# Altium PCB PCB_power_distrubation.PcbDoc
Units mm, origin at the board's own origin, x right, y up, seen from the top; angles counter-clockwise.
Board outline 53.25 x 77.5 mm, 2 copper layers (Top Layer, Bottom Layer); 14 components, 8 nets, 35 pads, 15 vias.
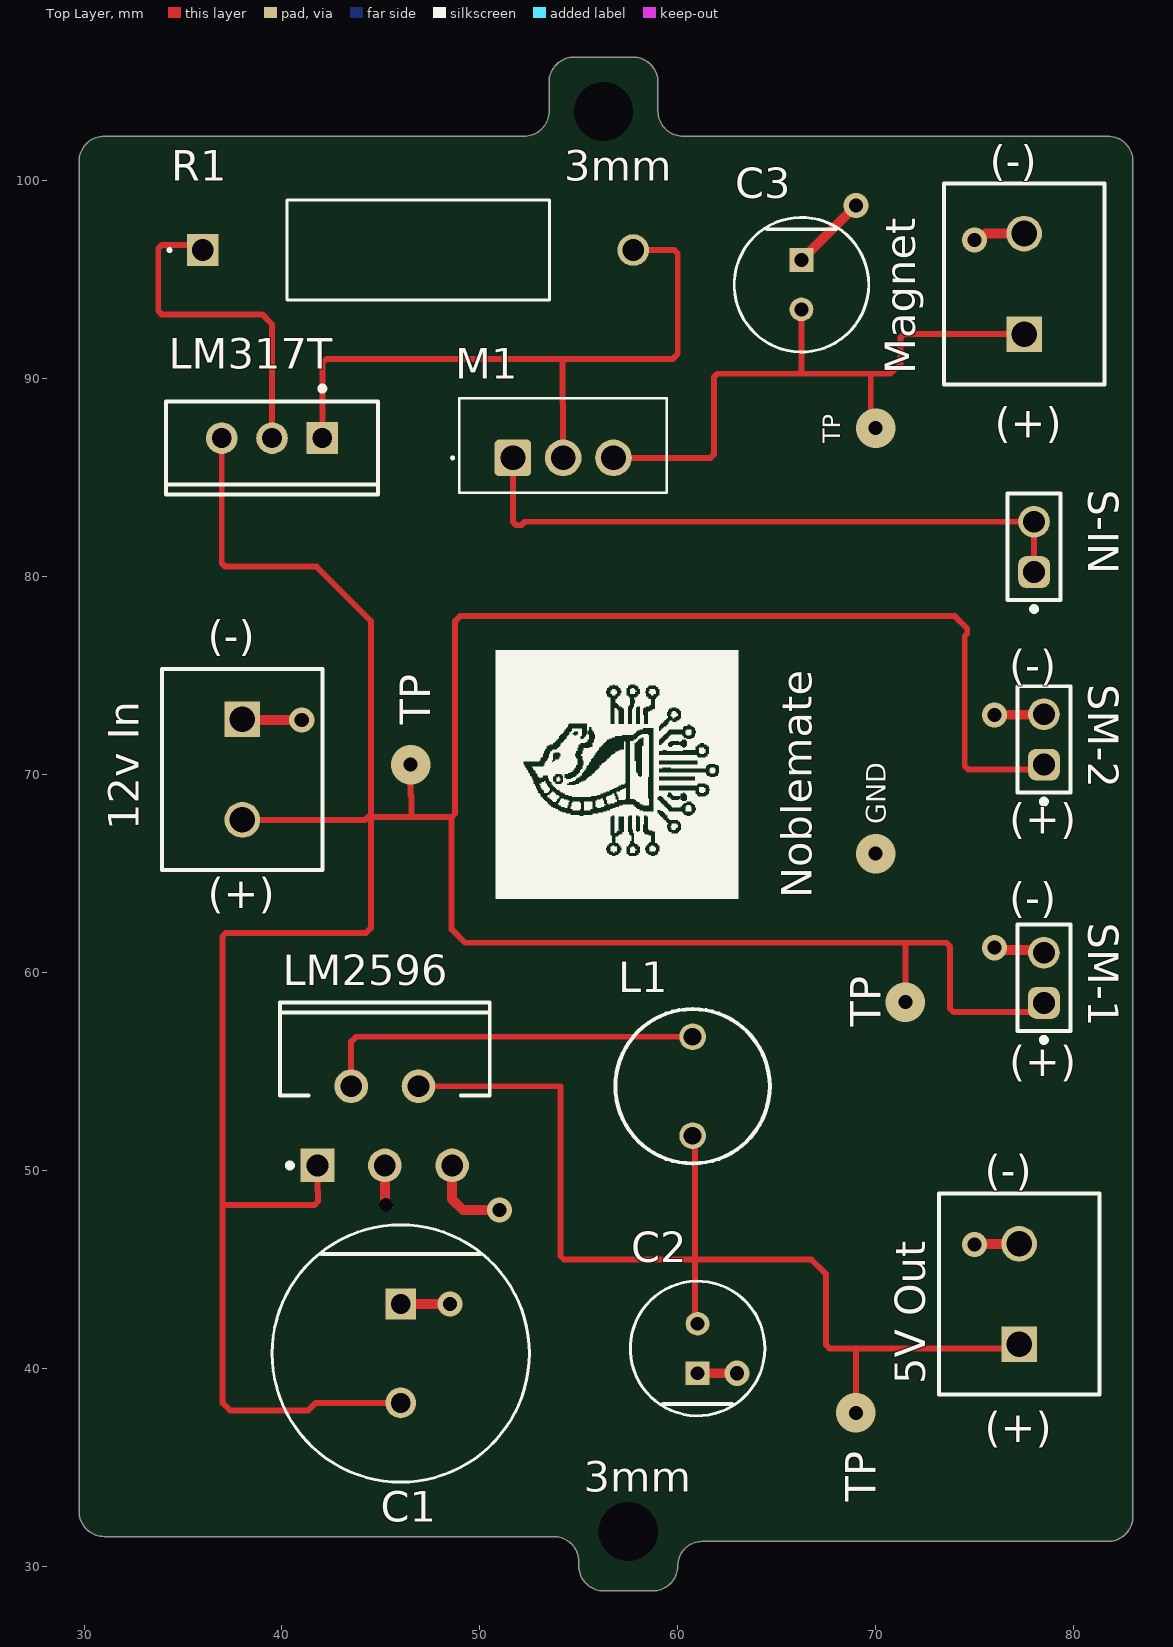
[diagram p0: Top Layer view]
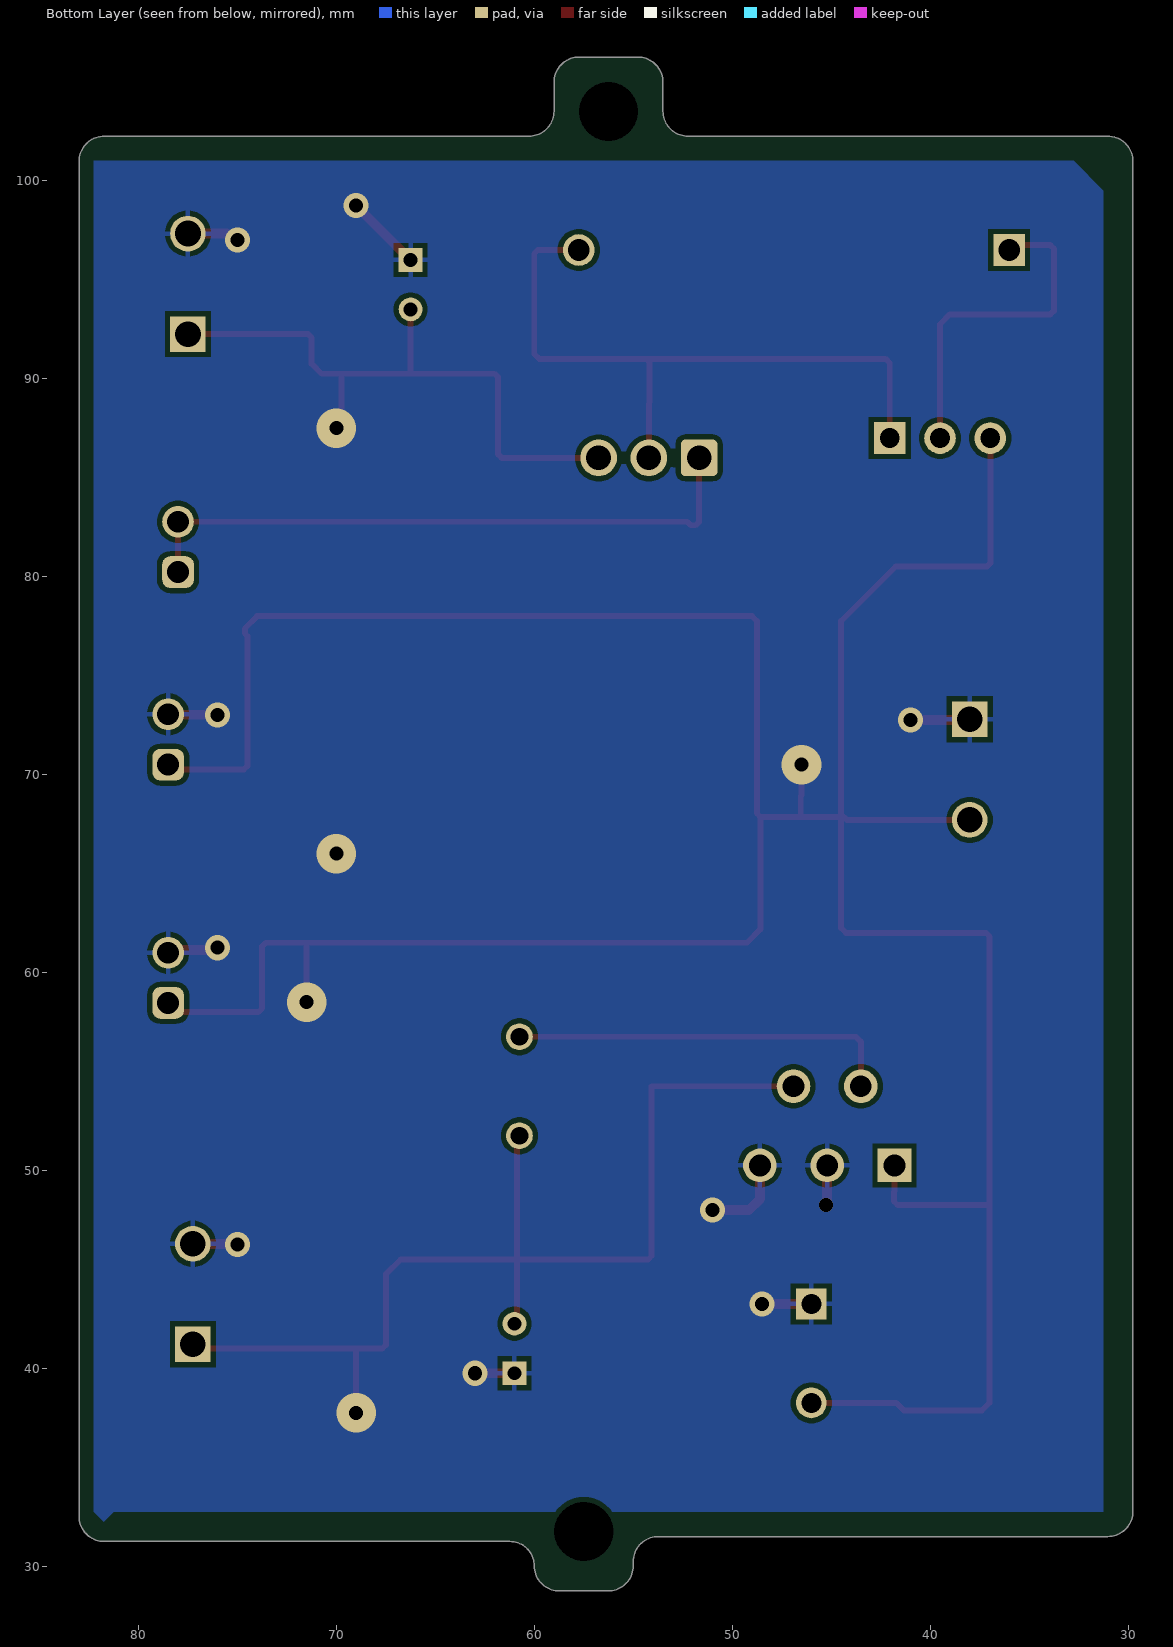
[diagram p1: Bottom Layer view, seen from below]
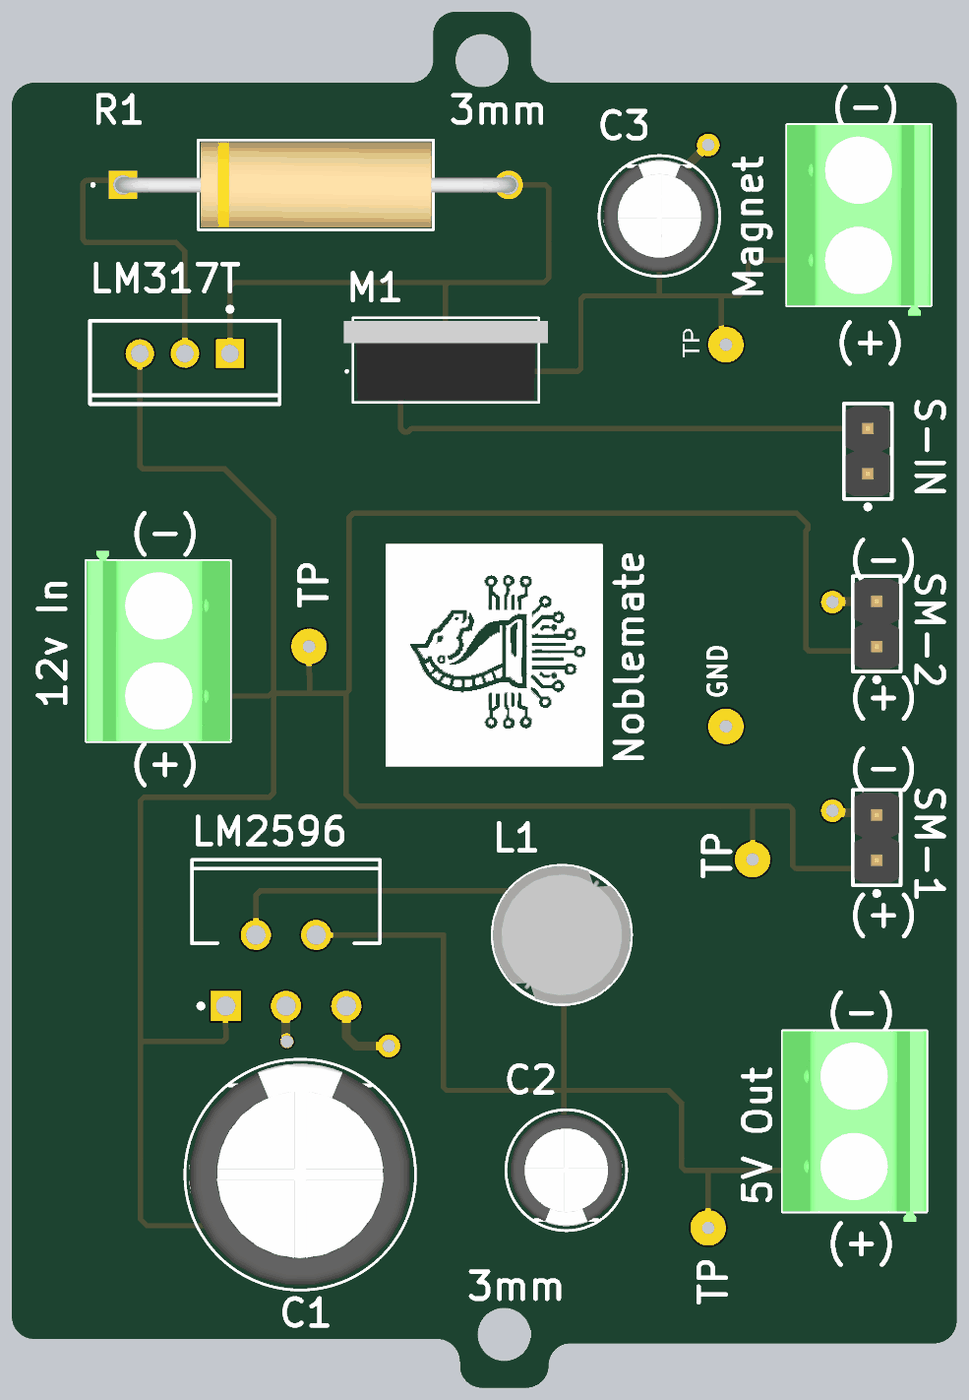
[diagram p2: 3D render of the assembled board from above, using the file's embedded part models]

## Layer stack, top to bottom
Top Solder: solder mask 0.0102, Solder Resist, Dk 3.5
Top Layer: signal copper 0.0356
Dielectric 1: dielectric 0.32, FR-4, Dk 4.8
Bottom Layer: signal copper 0.0356
Bottom Solder: solder mask 0.0102, Solder Resist, Dk 3.5

## Board outline
31.02,31.5 cw(c31.02,32.77) 29.75,32.77 29.75,100.98 cw(c31.02,100.98) 31.02,102.25 52.23,102.25 ccw(c52.23,103.52) 53.5,103.52 53.5,104.98 cw(c54.77,104.98) 54.77,106.25 57.73,106.25 cw(c57.73,104.98) 59,104.98 59,103.52 ccw(c60.27,103.52) 60.27,102.25 81.73,102.25 cw(c81.73,100.98) 83,100.98 83,32.52 cw(c81.73,32.52) 81.73,31.25 61.23,31.25 ccw(c61.23,30.02) 60,30.02 cw(c58.73,30.02) 58.73,28.75 56.27,28.75 cw(c56.27,30.02) 55,30.02 55,30.23 ccw(c53.73,30.23) 53.73,31.5

## Design rules (kind name [scope] priority, off if disabled: settings)
Clearance [All] p1: gap=0.254 ignorepadtopadclearanceinfootprint=FALSE
PolygonConnect [All] p1: connectstyle=Relief reliefconductorwidth=0.254 reliefentries=4 polygonreliefangle="90 Angle" airgapwidth=0.254
RoutingVias [All] p1: holewidth=0.711 width=1.27 viastyle="Through Hole" minholewidth=0.711 minwidth=1.27 maxholewidth=0.711 maxwidth=1.27
SolderMaskExpansion [All] p1: expansion=0.102 istentingtop=FALSE
SupplyNets "Schematic Supply Nets" [InNet('GND')] p1: voltage=0.000
Width [All] p1: maxlimit=0.5 minlimit=0.254 preferedwidth=0.3
30 further rules are at their usual default settings.

## Components (designator, comment, footprint, x,y, rotation, side; value= is the part's Value field where it differs from the comment)
"5V Out" "1729128" PHOE-1729128-2_V 77.25,43.75 r90 top (schematic designator HD1)
"12v In" "1729128" PHOE-1729128-2_V 38,70.25 r270 top (schematic designator HD6)
C1 "EEUFR1H681L" FP-RAD-TH-D_12_5_0_5-L_30-MFG 46,40.75 r270 top
C2 "EEUFR1E101B" FP-RAD-TH-D_6_3_0_5-L_11-MFG 61,41 r90 top
C3 "EEUFR1E101B" FP-RAD-TH-D_6_3_0_5-L_11-MFG 66.25,94.75 r270 top
L1 "744772390" WE-TI-L 60.75,54.25 r270 top
LM317T "LM317T/NOPB" NDE0003A 39.5,87 r180 top
LM2596 "LM2596T-ADJ/NOPB" NDH0005A 45.2,52.25 r0 top
M1 "2SK2927-E" SIP444W76P254L1016H2199Q3_PRSS0004AC-A_N 54.21,86.63 r0 top
Magnet "1729128" PHOE-1729128-2_V 77.5,94.79 r90 top (schematic designator HD3)
R1 "AC03000003008JAC00" RES_AC03_VIS 36.008,96.5 r0 top
S-IN "61300211121" 61300211121 78,81.5 r90 top (schematic designator HD2)
SM-1 "61300211121" 61300211121 78.5,59.73 r90 top (schematic designator HD5)
SM-2 "61300211121" 61300211121 78.5,71.77 r90 top (schematic designator HD4)

## Footprints (in the part's own frame and the unit in brackets; to place one, negate y for a bottom-side part, rotate by r counter-clockwise, add the part's x,y. Pads: shape width x height; smd on the part's side, far side on the other; paste and mask are expansions set on the pad)
61300211121 [mm] "Pin Header, pitch 2.54 mm, THT, Vertical, single row, 2p"
  rrect50% 1.6x1.6 hole 1.1: 1(-1.27,0)
  round 1.6 hole 1.1: 2(1.27,0)
  silkscreen extent -3.26,-1.35 2.69,1.35, body extent -2.54,-1.27 2.54,1.27, height 8.57
FP-RAD-TH-D_6_3_0_5-L_11-MFG [mm]
  rect 1.2x1.2 hole 0.7 paste-2539.97 mask+0: 1(-1.25,0)
  round 1.2 hole 0.7 paste-2539.97 mask+0: 2(1.25,0)
  silkscreen extent -3.4,-3.4 3.4,3.4, body extent -3.5,-3.5 3.5,3.5, height 0.25
FP-RAD-TH-D_12_5_0_5-L_30-MFG [mm]
  rect 1.55x1.55 hole 1 paste-2539.97 mask+0: 1(-2.5,0)
  round 1.55 hole 1 paste-2539.97 mask+0: 2(2.5,0)
  silkscreen extent -6.5,-6.5 6.5,6.5, body extent -6.6,-6.6 6.6,6.6, height 0.25
NDE0003A [mm] "FM, 3-Leads, Body 10.7x4.7mm, Pitch 2.54mm"
  rect 1.6x1.6 hole 1: 1(-2.54,0)
  round 1.6 hole 1: 2(0,0) 3(2.54,0)
  silkscreen extent -5.35,-2.62 5.35,2.85, body extent -5.4,-1.9 5.4,2.9, height 19.4
NDH0005A [mm] "FM, 5-Leads, Body 10.6x4.7mm, Pitch 1.7mm"
  rect 1.7x1.7 hole 1.1: 1(-3.4,-2)
  round 1.7 hole 1.1: 2(-1.7,2) 3(0,-2) 4(1.7,2) 5(3.4,-2)
  silkscreen extent -5.3,-2.12 5.3,6.23, body extent -5.35,-2.31 5.35,6.28, height 21.1
PHOE-1729128-2_V [mm] "Receptacle, 2-Leads, Body 8.1x10.16mm, Pitch 5.08mm"
  rect 1.8x1.8 hole 1.3: 1(-2.54,0)
  round 1.8 hole 1.3: 2(2.54,0)
  silkscreen extent -5.08,-4.05 5.08,4.05, body extent -5.65,-4.05 5.08,4.05, height 10.01
RES_AC03_VIS [mil]
  rect 63x63 / inner round 60 / far side rect 63x63 hole 43 paste-99999 mask+0: 1(0,0)
  round 63 / inner round 60 / far side round 63 hole 43 paste-99999 mask+0: 2(856,0)
  silkscreen extent -69,-100 689,100, body extent -16,-95 873,95, height 189
SIP444W76P254L1016H2199Q3_PRSS0004AC-A_N [mm] "SIP, Body Width 4.44mm, Lead Width 0.76mm, Pitch 2.54mm, Body Length 10.16mm, Height 21.99mm, IPC Medium Density"
  rrect25% 1.85x1.85 hole 1.25: 1(-2.54,-0.63)
  round 1.85 hole 1.25: 2(0,-0.63) 3(2.54,-0.63)
  silkscreen extent -5.64,-2.38 5.24,2.38, body extent -5.43,-2.57 5.43,2.57, height 0.25
WE-TI-L [mm] "THT Inductor, 2-Leads, Body 7.8 x 7.8 mm"
  round 1.35 hole 0.9: 1(-2.5,0) 2(2.5,0)
  silkscreen extent -3.9,-3.9 3.9,3.9, body extent -3.9,-3.9 3.89,3.9, height 9.5

## Part data
"5V Out" "12v In" Magnet: library part CMP-2000-05815-1, "PCB Terminal Block, 13.5 A, 400 V, 2-Pin THD, RoHS, Bulk", Current Rating=13500mA, Manufacturer="Phoenix Contact", Package Description="2-Pin Through Hole Device, Body 8.1 x 10.16 mm, Pitch 5.08 mm", Package Reference=1729128-2, Package Version=03/2015, Voltage Rating=400V, Datasheet URL=https://datasheet.ciiva.com/16046/1729128-16046181.pdf, Datasheet Version=12/2013, Manufacturer URL=http://www.phoenixcontact.com/, Mounting Technology=ThroughHole, No. of Positions=2, No. of Rows=1, Orientation=Horizontal, Package URL=https://www.phoenixcontact.com/online/portal/pi/pxc/product_detail_page/!ut/p/b1/3VdJjqNKFDxLH8AFycySyWY2ozFsEPOMMQaDOX1XedGL_1Vdm5YXJleknhSKeBkvI6EA8ncAo3AYoDhBQGco6KN7VURTdemj9us_IEKEZo_YHiPAEWEFmDGOHMORkqKYCORBZxgL7ZoaZYcbFFUZ3fqxSY6GOuxydWUuHqz1ynmMFygu583Bob0Ewr6Sd_l-5m-kAueHiB0jpRwZwe58wwtkpxtMYd_LmGcDRU02dRNEyWt6Y2ti5pSyJ_reIkzIulrqApdnbT11V5jnCKbYNCvhEM1MCpPByat_X379-iThf08CI5GfOPqfBeS3BRoBOdD55AKVv0iLwCMq-2BrzXWSGRH7pUGD9uwXQjiph3xL0DKQwdGa0JImiIOmBNOestqgwTHSSs2oOep-78apyXQBvNi8ZLaFjvjWvcaUEBu0MC6Wbe-d6mB0FAebo2lUWinqYaZs5DAYzV0RP9yitUjnGJ0iI9xhZkT42OCQNUJJhkgWINNQLP2JFP6OpMg3JCVg70jqHT0lvKOnhHf0lPuOnnLf0VPuWx6_dxwUIvwk5WMkT0kLL1mh61l2yZVSzG3pYV_bqo-mj6uMKwKwdnnW8Jh5RTOJzMOA5c-eJDaZQw4mTMPH02PvS_ZAqNVjVTo2WyYLkwH_KU1mmmG5kjRhDqPXLwwVHvVOjCM60-fpXvTDfMGW1PVFVS1r4e4yVDk4ZdNbkUHvqPqQSeian4UD39fNKmachqdJ1NJbyk8rXT9mXTvPk3oE5meulKGgiruPJek-4I9hTT6G8ZLOyRSm2RRVbThERQad5OS28hdt4YW4vG0stgYYzsWsK4_7y6DZMjJSCqri1kyiZR5vD7pwIrNR7QwPHTcLTI5qT7eRlpHrdGiupYlqQDJ7zy_CND8fWWBoLRXxk1RVcXiBQwbTD4Xi7KL-FuO94t9xaqweXzH, Packing=Bulk, PartNumber=1729128, Pitch=5.08mm, RoHS=TRUE
C1: library part CMP-05427-000465-1, "Aluminum Electrolytic Capacitors (Radial Lead Type) 680uF ±20% 50V"
C2 C3: library part CMP-05427-000897-1, "Aluminum Electrolytic Capacitors (Radial Lead Type) 100uF ±20% 25V", Capacitance=100uF, Case/Package=Radial, ESR (Equivalent Series Resistance)=130mR, Max Operating Temperature=105°C, Min Operating Temperature=-40°C, Package Quantity=2000, Ripple Current=455mA, Tolerance=20%, Voltage Rating=25V, Diameter=6.3mm, Features="General Purpose", Height=11.2mm, Height - Seated (Max)=0.441inch, Impedance=130mR, Lead Diameter=0.5mm, Lead Free="Lead Free", Lead Pitch=5mm, Length=11.2mm, Life (Hours)=2000Hour, Mount="Through Hole", Packaging="Tape and Reel", Polarity=Polar, Radiation Hardening=No, RoHS Compliant=Yes, Series=FR, Termination=Radial, Voltage Rating (DC)=25V
L1: library part CMP-0225-00043-1, "Radial Leaded Wire Wound Inductor WE-TI, L = 39.0 µH", Inductance="39.0 ÂµH", ComponentLink1Description="Manufacturer Link", ComponentLink1URL=http://www.we-online.com, ComponentLink2Description=Datasheet, ComponentLink2URL=http://www.we-online.de/katalog/media/pdf/744772390.pdf, DatasheetVersion="ver 8, Oct-2009", PackageDescription="THT Inductor, 2-Leads, Body 7.8 x 7.8 mm", PackageReference=WE-TI-L, PackageVersion=2006
LM317T: library part CMP-0062-02455-3, "3-Terminal Adjustable Regulator, 3-pin TO-220, Pb-Free", Manufacturer="Texas Instruments", PackageTopMarking="NSUZXYTTE#*LM317T P+", PowerWise=N, ComponentLink1Description="Datasheet URL", ComponentLink1URL=http://www.ti.com/general/docs/lit/getliterature.tsp?genericPartNumber=LM317-N&fileType=pdf, CompType="LDO IC", PackageDescription="TO-220, Molded, 3 Lead, Straight", PackageReference=NDE0003A, PinCount=3, RoHS=Y
LM2596: library part CMP-0069-01928-3, "SIMPLE SWITCHER® Power Converter 150 KHz 3A Step-Down Voltage Regulator, 5-pin TO-220, Pb-Free", Manufacturer="Texas Instruments", PackageTopMarking="NSUZXYTTE#*LM2596T*-ADJ P+", PowerWise=N, ComponentLink1Description="Datasheet URL", ComponentLink1URL=http://www.ti.com/general/docs/lit/getliterature.tsp?genericPartNumber=LM2596&fileType=pdf, CompType=Switcher, PackageDescription="TO-220, Molded, Stagger Bend, 5 Lead", PackageReference=NDH0005A, PinCount=5, RoHS=Y
M1: library part CMP-00572-23028033-1, "Trans MOSFET N-CH Si 60V 10A 3-Pin(3+Tab) TO-220AB Tube", Case/Package=TO-220AB, Continuous Drain Current (ID)=10A, Drain to Source Voltage (Vdss)=60V, Gate to Source Voltage (Vgs)=20V, Manufacturer Lifecycle Status="NOT RECOMMENDED FOR NEW DESIGNS", Max Operating Temperature=150°C, Min Operating Temperature=-55°C, Power Dissipation=30W, China RoHS=Compliant, ComponentLink1Description="Manufacturer's Website", ComponentLink1URL=http://www.renesas.com, ComponentLink2Description="Datasheet URL", ComponentLink2URL=https://octopart.com/cad-content/api/get-model-datasheet/15189/23028033, ComponentLink3Description="Manufacturer's Package Drawing", ComponentLink3URL=https://www.renesas.com/en/document/psc/package-drawing-220ab-4pin-prss0004ac, Fall Time=70ns, Height=4.64mm, HelpURL=https://octopart.com/cad-content/api/get-model-datasheet/15189/23028033, Lead Free="Lead Free", Lifecycle Status=NRND, Mount="Through Hole", Number of Elements=1, Number of Pins=3, Radiation Hardening=No, Rds On Max=75mΩ, Rise Time=55ns, RoHS=Compliant, Turn-Off Delay Time=60ns, Turn-On Delay Time=10ns
R1: library part CMP-00030-39747180-1, "AC03000003008JAC00 Resistor, 3 Ohm, ± 5%, 3 W, Axial Leaded, Wirewound, General Purpose", Case/Package=Axial, Max Operating Temperature=275°C, Max Power Dissipation=3W, Min Operating Temperature=-40°C, Resistance=3Ω, Temperature Coefficient=-80ppm/°C, Tolerance=5%, Voltage Rating=3V, Composition=Wirewound, Contact Plating=Tin, Diameter=4.8mm, Features="Flame Retardant Coating", Lead Diameter=800µm, Length=13mm, NexarPartId=39747180, Number of Pins=2, Number of Terminations=2, Packaging="Tape & Box (TB)", Power Rating=3W, Radiation Hardening=No, REACH SVHC=Unknown, RoHS=Compliant, Schedule B="8533210080, 8533210080", Termination=Axial, Thickness=4.8006mm, Voltage Rating (DC)=3V, Width=4.8mm
S-IN SM-1 SM-2: library part CMP-1712-00002-6, Color=Black, Contact Resistance=20mΩ, Current Rating=3A, Max Operating Temperature=125°C, Min Operating Temperature=-40°C, Operating Supply Voltage=250V, Connector Type="Male Pin", Contact Gender=Male, Contact Material=Copper, Contact Mating Length=5.9944mm, Contact Plating=Gold, Gender=Male, Height=8.94mm, Housing Material=PBT, Lead Free="Lead Free", Lead Pitch=2.54mm, Mount="Through Hole", NexarPartId=20081794, Number of Contacts=2, Number of Pins=2, Number of Positions=2, Number of Rows=1, Orientation=Vertical, Packaging=Bulk, Pitch=2.54mm, REACH SVHC="No SVHC", RoHS=Compliant, Termination="Through Hole", Voltage Rating=250V

## Free pads (board coordinates)
  round 1.524 hole 3 unplated: 1(57.5,31.75) 2(56.25,103.5)

## Via types
v1: diameter 1.27, hole 0.711, Top Layer to Bottom Layer, 9 vias
v2: diameter 2, hole 0.711, Top Layer to Bottom Layer, 5 vias
v3: diameter 0.711, hole 0.711, Top Layer to Bottom Layer, 1 vias

## Nets (pads, with @x,y where several pads share a name; then routed paths per layer and width w, separated by ;. In a path a pad name is that pad's centre, name@x,y a point inside that pad or via, vN(x,y) a via of type N, cw(c..) or ccw(c..) an arc to the next point about the centre after c; other vN are vias at no path point)
GND: "5V Out.2" "12v In.1" C1.1 C2.1 C3.1 LM2596.3 LM2596.5 Magnet.2 SM-1.2 SM-2.2 | length 27.8
  Top Layer w0.5: 38,72.79 38.04,72.75 v1(41,72.75) ; LM2596.3 45.2,48.3 v3(45.25,48.25) ; C1.1 v1(48.5,43.25) ; LM2596.5 48.6,48.543 49.143,48 v1(51,48) ; C2.1 v1(63,39.75) ; C3.1 v1(69,98.75) ; v1(75,46.25) 75.02,46.27 77.23,46.27 77.25,46.29 ; v1(75,97) 75.208,97 75.538,97.33 Magnet.2 ; v1(76,61.25) 76.125,61.125 78.375,61.125 SM-1.2 ; v1(76,73) 76.02,73.02 78.48,73.02 SM-2.2
  other v2: 70,66
NetC1_2: "12v In.2" C1.2 LM317T.3 LM2596.1 SM-1.1 SM-2.1 | length 181.5
  Top Layer w0.3: LM317T.3 36.96,80.676 37.136,80.5 41.75,80.5 44.5,77.75 44.5,68 ; 38,67.71 44.21,67.71 44.5,68 ; LM2596.1 41.8,48.95 41.826,48.924 41.826,48.426 41.65,48.25 37,48.25 ; C1.2 41.707,38.25 41.331,37.874 37.376,37.874 37,38.25 37,48.25 ; v2(46.5,70.5) 46.5,68.972 46.537,68.935 46.537,67.855 ; v2(71.5,58.5) 71.5,61.5 ; SM-1.1 78.04,58 73.926,58 73.75,58.176 73.75,61.324 73.574,61.5 71.5,61.5 ; SM-2.1 78.25,70.25 74.676,70.25 74.5,70.426 74.5,77 74.626,77.126 74.626,77.374 74,78 49,78 48.75,77.75 48.75,68.031 48.574,67.855 ; 37,48.25 37,61.824 37.176,62 44.25,62 44.5,62.25 44.5,67.855 ; 44.5,67.855 46.537,67.855 ; 44.5,67.855 44.5,68 ; 46.537,67.855 48.574,67.855 ; 48.574,67.855 48.574,62.176 49.25,61.5 71.5,61.5
  Top Layer w0.5: SM-2.1@78.25,70.25 78.5,70.25 SM-2.1
NetC2_2: "5V Out.1" C2.2 L1.2 LM2596.4 | length 55.9
  Top Layer w0.3: LM2596.4 54.074,54.25 54.074,45.676 54.25,45.5 60.875,45.5 ; L1.2 60.875,51.625 60.875,45.5 ; C2.2 60.875,42.375 60.875,45.5 ; v2(69,37.75) 69,41 ; 77.25,41.21 77.04,41 69,41 ; 60.875,45.5 66.75,45.5 67.5,44.75 67.5,41.176 67.676,41 69,41
NetC3_2: C3.2 M1.3 Magnet.1 | length 32.5
  Top Layer w0.3: M1.3 61.65,86 61.826,86.176 61.826,90.074 62.001,90.25 66.25,90.25 ; C3.2 66.25,90.25 ; v2(70,87.5) 69.75,87.75 69.75,90.25 ; Magnet.1 71.426,92.25 71.25,92.074 71.25,90.75 70.75,90.25 69.75,90.25 ; 66.25,90.25 69.75,90.25
NetHD2_1: M1.1 S-IN.1 S-IN.2 | length 32.2
  Top Layer w0.3: M1.1 51.67,82.77 51.846,82.594 52.094,82.594 52.27,82.77 S-IN.2 S-IN.1
NetL1_1: L1.1 LM2596.2 | length 19.6
  Top Layer w0.3: LM2596.2 43.5,56.5 43.75,56.75 L1.1
NetLM317T_1: LM317T.1 M1.2 R1.2 | length 34.4
  Top Layer w0.3: LM317T.1 42.04,90.79 42.25,91 54.35,91 ; M1.2 54.21,88.752 54.174,88.788 54.174,90.824 54.35,91 ; R1.2 59.824,96.5 60,96.324 60,91.25 59.75,91 54.35,91
NetLM317T_2: LM317T.2 R1.1 | length 17.4
  Top Layer w0.3: R1.1 35.758,96.75 33.926,96.75 33.75,96.574 33.75,93.426 33.926,93.25 39,93.25 39.5,92.75 LM317T.2

## Polygon pours and split planes (outlines as drawn)
GND on Bottom Layer "GND_L02_P000" (solid, pour order 0): 81.25,32.75 81.75,32.25 82.25,32.75 82.25,101 32.75,101 31.25,99.5 31.25,32.75

## Silkscreen, mask and mechanical layers (free items; w line width, h text height)
Top Overlay:
  drawing of 24 lines, arcs and shapes, not listed
  text "(-)" at 75.754,100.254 h1.52
  text "3mm" at 54.254,100.004 h1.52
  text "(+)" at 76.004,87.004 h1.52
  text "TP" at 68.5,86.75 h1.52 r90
  text "(-)" at 36.254,76.254 h1.52
  text "(-)" at 76.754,74.754 h1.52
  text "TP" at 47.496,72.504 h1.52 r90
  text "GND" at 70.5,67.5 h1 r90
  text "(+)" at 76.754,67.004 h1.52
  text "Noblemate" at 66.774,63.75 h1.52 r90
  text "(+)" at 36.254,63.254 h1.52
  text "(-)" at 76.754,63.004 h1.52
  text "TP" at 70.246,57.254 h1.52 r90
  text "(+)" at 76.754,54.754 h1.52
  text "(-)" at 75.504,49.254 h1.52
  text "(+)" at 75.504,36.254 h1.52
  text "3mm" at 55.254,33.754 h1.52
  text "TP" at 69.996,33.254 h1.52 r90
Mechanical 1:
  lines w0.254: 29.75,32.77 ccw(c31.02,32.77) 31.02,31.5 53.73,31.5 cw(c53.73,30.23) 55,30.23 55,30.02 ccw(c56.27,30.02) 56.27,28.75 58.73,28.75 ccw(c58.73,30.02) 60,30.02 cw(c61.23,30.02) 61.23,31.25 81.73,31.25 ccw(c81.73,32.52) 83,32.52 83,100.98 ccw(c81.73,100.98) 81.73,102.25 60.27,102.25 cw(c60.27,103.52) 59,103.52 59,104.98 ccw(c57.73,104.98) 57.73,106.25 54.77,106.25 ccw(c54.77,104.98) 53.5,104.98 53.5,103.52 cw(c52.23,103.52) 52.23,102.25 50.25,102.25 31.02,102.25 ccw(c31.02,100.98) 29.75,100.98 29.75,32.77